# Altium PCB Nixie Tester.PcbDoc
Units mm, origin at the board's own origin, x right, y up, seen from the top; angles counter-clockwise.
Board outline 38 x 70 mm, 2 copper layers (Top Layer, Bottom Layer), stack 1.57 mm thick; 37 components, 31 nets, 102 pads, 276 vias.
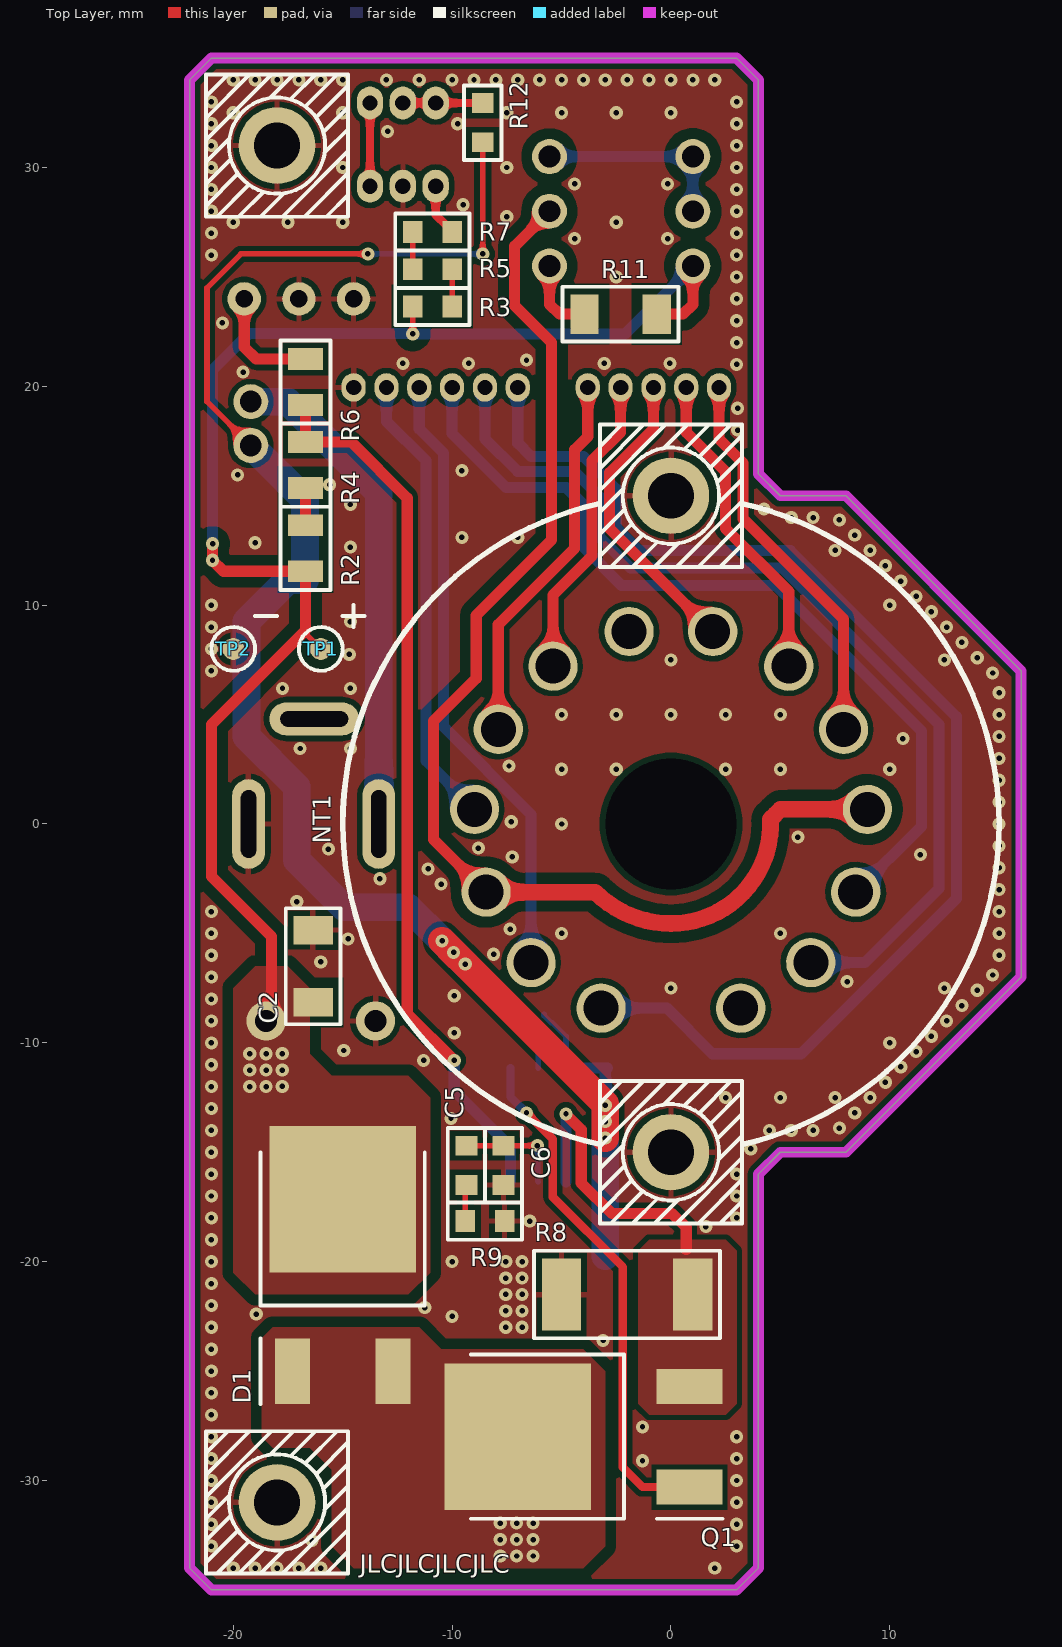
[diagram p0: Top Layer view]
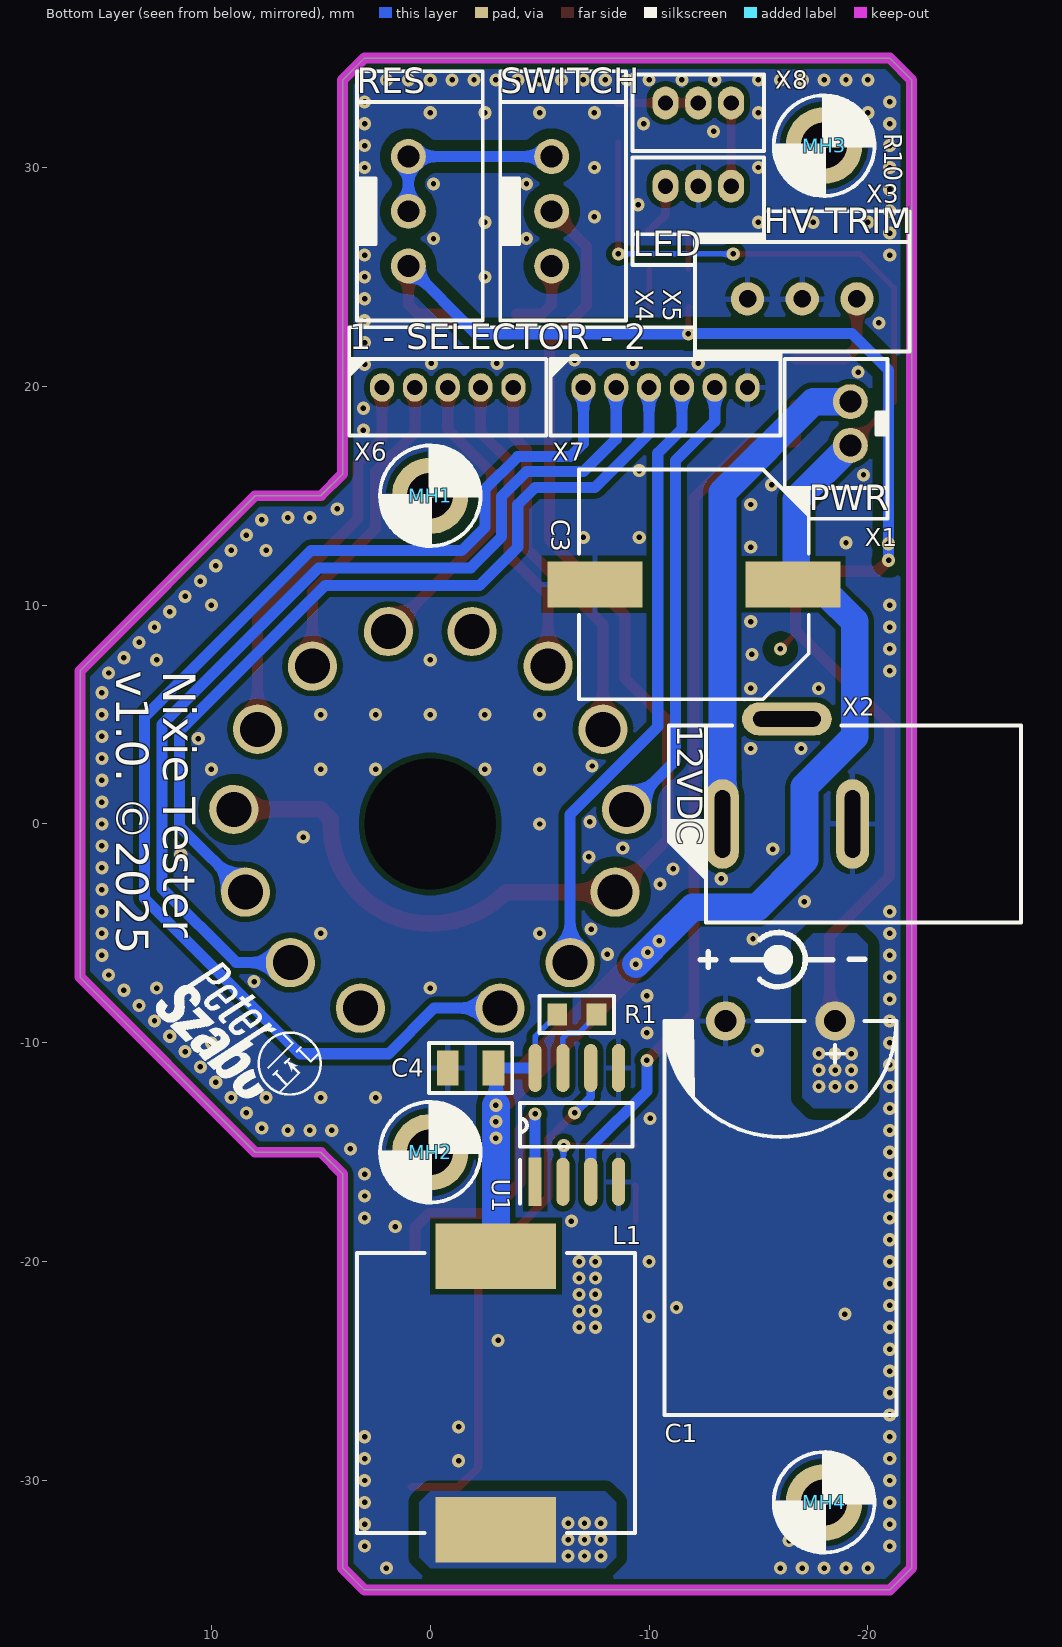
[diagram p1: Bottom Layer view, seen from below]

## Layer stack, top to bottom
Top Solder: solder mask 0.0102, Solder Resist, Dk 3.5
Top Layer: signal copper 0.035
Dielectric1: core 1.5, FR-4, Dk 4.8
Bottom Layer: signal copper 0.035
Bottom Solder: solder mask 0.0102, Solder Resist, Dk 3.5

## Board outline
-21,35 3,35 4,34 4,16 5,15 8,15 16,7 16,-7 8,-15 5,-15 4,-16 4,-34 3,-35 -21,-35 -22,-34 -22,34

## Design rules (kind name [scope] priority, off if disabled: settings)
AssemblyTestPointUsage [All] p1 off:
AssemblyTestpoint [All] p1 off: testpointundercomponent=TRUE minsize=1.016 maxsize=2.54 preferedsize=1.524 minholesize=0 maxholesize=1.016 preferedholesize=0.813 testpointgrid=0.025 usegrid=TRUE gridtolerance=0 allowsidetop=TRUE allowsidebottom=TRUE
Clearance ClearanceHV [InNetClass('HighVoltage')] p1: gap=0.5 ignorepadtopadclearanceinfootprint=FALSE except(0: Arc-Hole Track-Hole SMDPad-Hole THPad-Hole Via-Hole Fill-Hole Poly-Hole Region-Hole Text-Hole)
Clearance ClearanceFill [InPolygon vs InPolygon] p2: gap=0.25 ignorepadtopadclearanceinfootprint=FALSE except(0: Arc-Hole Track-Hole SMDPad-Hole THPad-Hole Via-Hole Fill-Hole Poly-Hole Region-Hole Text-Hole)
Clearance Poligone [InPolygon vs not InPolygon] p3: gap=0.25 ignorepadtopadclearanceinfootprint=FALSE except(0: Arc-Hole Track-Hole SMDPad-Hole THPad-Hole Via-Hole Fill-Hole Poly-Hole Region-Hole Text-Hole)
Clearance Clearance-xPP-xTP-xTT [All] p4: gap=0.15 ignorepadtopadclearanceinfootprint=FALSE except(0: Arc-Hole Track-Hole SMDPad-Hole THPad-Hole Via-Hole Fill-Hole Poly-Hole Region-Hole Text-Hole)
ComponentClearance [All] p1: gap=0.25 collisioncheckmode=3 verticalgap=0.25 showdistances=FALSE
DiffPairsRouting [All] p1: maxlimit=0.25 minlimit=0.15 mostfreqgap=0.25 toplayer_minwidth=0.254 toplayer_maxwidth=0.381 toplayer_prefwidth=0.381 bottomlayer_minwidth=0.254 bottomlayer_maxwidth=0.381 bottomlayer_prefwidth=0.381 substack1={06652235-AFCE-417E-9911-24E9A01F5C8B} toplayer_{06652235-afce-417e-9911-24e9a01f5c8b}_mingap=0.25 toplayer_{06652235-afce-417e-9911-24e9a01f5c8b}_minwidth=0.381 toplayer_{06652235-afce-417e-9911-24e9a01f5c8b}_maxwidth=0.381 toplayer_{06652235-afce-417e-9911-24e9a01f5c8b}_prefwidth=0.381 bottomlayer_{06652235-afce-417e-9911-24e9a01f5c8b}_mingap=0.25 bottomlayer_{06652235-afce-417e-9911-24e9a01f5c8b}_minwidth=0.381 bottomlayer_{06652235-afce-417e-9911-24e9a01f5c8b}_maxwidth=0.381 bottomlayer_{06652235-afce-417e-9911-24e9a01f5c8b}_prefwidth=0.381 maxuncoupledlength=12.5
FanoutControl Fanout_BGA [IsBGA] p1 off: bgadir=Out bgaviamode=Centered fanoutstyle=Auto fanoutdirection=Alternating viagrid=0.025 // Fanout_BGA (Default Rule)
Height [All] p1: minheight=0 maxheight=508 prefheight=12.5
HoleSize HoleSize-PTH [All] p1: absolutevalues=TRUE maxlimit=12.7 minlimit=0.25 maxpercent=80.000 minpercent=20.000
HoleToHoleClearance [All] p1: gap=0.15 allowstackedmicrovias=TRUE
MinimumAnnularRing "Minimum IAR  >0.45mm" [((ObjectKind = 'Pad') OR (ObjectKind = 'Via')) And (Layer = 'MultiLayer') And (HoleDiameter > AsMM(0.45))] p1: minimumring=0.125 // minimum inner annular ring for pads > 0.45mm finished hole size
MinimumAnnularRing "Minimum IAR <=0.45mm" [((ObjectKind = 'Pad') OR (ObjectKind = 'Via')) And (Layer = 'MultiLayer') And (HoleDiameter <= AsMM(0.45))] p2: minimumring=0.125 // minimum inner annular ring for pads <= 0.45mm finished hole size
MinimumSolderMaskSliver [All] p1: minsoldermaskwidth=0.1
PlaneClearance PlaneClearance-IPI [All] p1: clearance=0.4
PlaneConnect PlaneConnect_1 [All] p1: planeconnectstyle=Relief reliefexpansion=0.508 reliefentries=4 reliefconductorwidth=0.254 reliefairgap=0.254
PlaneConnect [All] p2: planeconnectstyle=Relief reliefexpansion=0.4 reliefentries=4 reliefconductorwidth=0.508 reliefairgap=0.254
PolygonConnect PolygonConnect-xTW [InNet('GND') vs IsVia] p1: connectstyle=Direct reliefconductorwidth=0.508 reliefentries=4 polygonreliefangle="90 Angle" airgapwidth=0.254
PolygonConnect PolygonConnect_1 [InNet('GND') vs not(IsVia)] p2: connectstyle=Relief reliefconductorwidth=0.254 reliefentries=4 polygonreliefangle="90 Angle" airgapwidth=0.254
PolygonConnect [All] p3: connectstyle=Direct reliefconductorwidth=0.381 reliefentries=4 polygonreliefangle="90 Angle" airgapwidth=0.25
RoomDefinition "Nixie tester" [InComponentClass('Nixie tester')] p1: confinementstyle=ConfineIn formatcopy=TRUE lockcomponents=FALSE outline 18.05,-27.05 243.05,-27.05 243.05,-14.05 18.05,-14.05
RoutingCorners [All] p1: cornerstyle=45-Degree minsetback=2.5 maxsetback=2.5
RoutingVias "RoutingVias > 0.45mm" [(ObjectKind = 'Via') And (HoleDiameter > AsMM(0.45))] p1: holewidth=0.25 width=0.6 viastyle="Through Hole" minholewidth=0.25 minwidth=0.5 maxholewidth=0.9 maxwidth=1.4 // finishet hole size > 0.45mm
RoutingVias "RoutingVias <= 0.45mm" [(ObjectKind = 'Via') And (HoleDiameter <= AsMM(0.45))] p2: holewidth=0.25 width=0.6 viastyle="Through Hole" minholewidth=0.25 minwidth=0.5 maxholewidth=0.5 maxwidth=1 // finishet hole size <= 0.45mm
SilkToSilkClearance [All] p1: silktosilkclearance=0.2
SilkToSolderMaskClearance SilkscreenOverComponentPads [IsPad] p1: minsilkscreentomaskgap=0.15 clearancetoexposedcopper=TRUE
SolderMaskExpansion [All] p1: expansion=0.1 istentingtop=FALSE
Width Width-xTW [All] p1: maxlimit=5 minlimit=0.23 preferedwidth=0.254 substack1={06652235-AFCE-417E-9911-24E9A01F5C8B} toplayer_{06652235-afce-417e-9911-24e9a01f5c8b}_maxwidth=2.54 bottomlayer_{06652235-afce-417e-9911-24e9a01f5c8b}_maxwidth=2.54
16 further rules are at their usual default settings.

## Classes and differential pairs
net class HighVoltage: HV NetD1_1 NetNT1_4 NetR2_1 NetR3_1 NetR11_1 NetX4_2

## Components (designator, comment, footprint, x,y, rotation, side; value= is the part's Value field where it differs from the comment)
C1 "10uF" "CAP-ELCO-10mm-laying THT" -16,-9 r180 bottom
C2 "100nF" CAP-1206 -16.35,-6.5 r270 top
C3 "470uF" CAP-Panasonic -12.05,10.95 r0 bottom
C4 "100nF" CAP-0805 -1.85,-11.15 r180 bottom
C5 "22nF" CAP-0603 -9.35,-15.6 r90 top
C6 "100nF" CAP-0603 -7.65,-15.6 r90 top
D1 "V20PW22-M3/I" "D-DPAK (diode)" -15,-25 r90 top
L1 "22uH" IND-SMD-12.7x12.7mm -3,-26 r270 bottom
MH1 "MECH - M2 screw" "MECH-M2 - large pad" 0,15 r180 bottom
MH2 "MECH - M2 screw" "MECH-M2 - large pad" 0,-15 r180 bottom
MH3 "MECH - M2 screw" "MECH-M2 - large pad" -18,31 r180 bottom
MH4 "MECH - M2 screw" "MECH-M2 - large pad" -18,-31 r180 bottom
NT1 "IN-18" "VT-IN-18 - no silk screen" 0,0 r90 top locked
Q1 "STD18N55M5" D-DPAK 0.85,-28 r180 top
R1 "10k" RES-0603 -6.7,-8.7 r0 bottom
R2 "1M" RES-0805 -16.7,12.6 r270 top
R3 "100k" RES-0603 -10.9,23.65 r180 top
R4 "510k" RES-0805 -16.7,16.4 r270 top
R5 "100k" RES-0603 -10.9,25.35 r0 top
R6 "4k7" RES-0805 -16.7,20.2 r270 top
R7 "100k" RES-0603 -10.9,27.05 r180 top
R8 "0R10" RES-2512 -2,-21.5 r0 top
R9 "4k7" RES-0603 -8.5,-18.15 r180 top
R10 "10k" RES-TRIM-THT -17,24 r270 bottom
R11 "10k" RES-1206 -2.3,23.3 r0 top
R12 "22k" RES-0603 -8.6,32.05 r90 top
TP1 "MISC - Testpoint SMT" MISC-TESTPOINT-SMT -16,8 r90 top
TP2 "MISC - Testpoint SMT" MISC-TESTPOINT-SMT -20,8 r0 top
U1 "LM3478" IC-SOIC-8 -6.7,-13.75 r90 bottom
X1 "CONN - 2P -THT-JST 2.00mm" "CONN-2P-THT-STRAIGHT-JST 2.00mm" -19.2,18.3 r270 bottom
X2 "CONN - PWR" CONN-POWER -19.3,0 r0 bottom
X3 "CONN - 3P - THT-JST 1.5mm" "CONN-3P-THT-JST 1.5mm" -12.25,29.15 r180 bottom
X4 "CONN - 3P -THT-JST 2.5mm" "CONN-3P-THT-STRAIGHT-JST 2.5mm" 1,28 r90 bottom
X5 "CONN - 3P -THT-JST 2.5mm" "CONN-3P-THT-STRAIGHT-JST 2.5mm" -5.55,28 r90 bottom
X6 "CONN - 5P - THT-JST 1.5mm" "CONN-5P-THT-STRAIGHT-JST 1.5mm" -0.8,19.95 r180 bottom
X7 "CONN - 6P - THT-JST 1.5mm" "CONN-6P-THT-STRAIGHT-JST 1.5mm" -10.75,19.95 r180 bottom
X8 "CONN - 3P - THT-JST 1.5mm" "CONN-3P-THT-JST 1.5mm" -12.25,32.95 r180 bottom

## Footprints (in the part's own frame and the unit in brackets; to place one, negate y for a bottom-side part, rotate by r counter-clockwise, add the part's x,y. Pads: shape width x height; smd on the part's side, far side on the other; paste and mask are expansions set on the pad)
CAP-0603 [mm]
  rect 0.9x1 smd: 1(-0.9,0) 2(0.9,0)
  silkscreen extent -1.7,-0.85 1.7,0.85, body extent -0.8,-0.41 0.8,0.41, height 0.57
CAP-0805 [mm]
  rect 1x1.6 smd: 1(-1.05,0) 2(1.05,0)
  silkscreen extent -1.9,-1.15 1.9,1.15, body extent -1,-0.63 1,0.64, height 0.52
CAP-1206 [mm]
  rect 1.3x1.8 smd: 1(-1.65,0) 2(1.65,0)
  silkscreen extent -2.65,-1.25 2.65,1.25, body extent -1.6,-0.81 1.6,0.81, height 1.32
"CAP-ELCO-10mm-laying THT" [mm]
  round 1.8 hole 1: 1(-2.5,0) 2(2.5,0)
  silkscreen extent -5.3,-18 5.3,0, body extent -5.3,-18.05 5.2,2.45, height 10.65
CAP-Panasonic [mm]
  rect 4.35x2.1 smd: 1(4.525,0) 2(-4.525,0)
  silkscreen extent -5.25,-5.25 5.25,5.25, body extent -5.8,-5.15 5.8,5.15, height 10.2
"CONN-2P-THT-STRAIGHT-JST 2.00mm" [mm]
  round 1.6 hole 1: 1(-1,0) 2(1,0)
  silkscreen extent -2.95,-3 2.95,1.7, body extent -2.93,-2.97 2.93,1.7, height 5.89
"CONN-3P-THT-JST 1.5mm" [mm]
  oval 1.2x1.5 hole 0.7: 1(-1.5,0) 2(0,0) 3(1.5,0)
  silkscreen extent -3,-2.2 3,1.3, body extent -3,-2.2 3,1.3, height 4.5
"CONN-3P-THT-STRAIGHT-JST 2.5mm" [mm]
  round 1.6 hole 1: 1(-2.5,0) 2(0,0) 3(2.5,0)
  silkscreen extent -5,-3.4 5,2.35, body extent -4.95,-3.4 4.95,2.35, height 7
"CONN-5P-THT-STRAIGHT-JST 1.5mm" [mm]
  oval 1.1x1.3 hole 0.7: 1(-3,0) 2(-1.5,0) 3(0,0) 4(1.5,0) 5(3,0)
  silkscreen extent -4.5,-2.2 4.5,1.35, body extent -4.5,-2.2 4.5,1.3, height 4.5
"CONN-6P-THT-STRAIGHT-JST 1.5mm" [mm]
  oval 1.1x1.3 hole 0.7: 1(-3.75,0) 2(-2.25,0) 3(-0.75,0) 4(0.75,0) 5(2.25,0) 6(3.75,0)
  silkscreen extent -5.25,-2.2 5.25,1.3, body extent -5.25,-2.2 5.25,1.3, height 4.5
CONN-POWER [mm]
  oval 1.5x4.1 hole 0.7 slot 3.1 at 90 deg: 1(0,0) 2(5.945,0)
  oval 4.1x1.5 hole 0.7 slot 3.1 at 0 deg: 3(3,-4.8)
  silkscreen extent -7.7,-4.5 6.7,4.5, body extent -7.7,-4.9 6.7,4.5, height 11
D-DPAK [mm]
  rect 3x1.6 smd: 1(0,2.3) 2(0,-2.3)
  rect 6.7x6.7 smd: 3(7.85,0)
  silkscreen extent -1.5,-3.75 10,3.75, body extent 0,-3.37 10.1,3.37, height 2.37
"D-DPAK (diode)" [mm]
  rect 3x1.6 smd: 1(0,2.3) 1(0,-2.3)
  rect 6.7x6.7 smd: 2(7.85,0)
  silkscreen extent -1.5,-3.75 10,3.75, body extent 0,-3.37 10.1,3.37, height 2.37
IC-SOIC-8 [mm]
  rect 2.2x0.6 smd: 1(-2.6,1.905)
  oval 2.2x0.6 smd: 2(-2.6,0.635) 3(-2.6,-0.635) 4(-2.6,-1.905) 5(2.6,-1.905) 6(2.6,-0.635) 7(2.6,0.635) 8(2.6,1.905)
  silkscreen extent -3.6,-2.54 1,2.6, body extent -3.06,-2.45 2.94,2.45, height 1.7
IND-SMD-12.7x12.7mm [mm]
  rect 3x5.5 smd: 1(-6.25,0) 2(6.25,0)
  silkscreen extent -6.4,-6.35 6.4,6.35, body extent -6.6,-6.35 6.6,6.35, height 6.55
"MECH-M2 - large pad" [mm]
  round 3.5 hole 2.1: MH(0,0)
  silkscreen extent -2.3,-2.3 2.3,2.3
MISC-TESTPOINT-SMT [mm]
  round 1 smd paste-5: 1(0,0)
  silkscreen extent -1,-1 1,1
RES-0603 [mm]
  rect 0.9x1 smd: 1(-0.9,0) 2(0.9,0)
  silkscreen extent -1.7,-0.85 1.7,0.85, body extent -0.77,-0.43 0.78,0.43, height 0.48
RES-0805 [mm]
  rect 1x1.6 smd: 1(-1.05,0) 2(1.05,0)
  silkscreen extent -1.9,-1.15 1.9,1.15, body extent -1,-0.63 1,0.63, height 0.48
RES-1206 [mm]
  rect 1.3x1.8 smd: 1(-1.65,0) 2(1.65,0)
  silkscreen extent -2.65,-1.25 2.65,1.25, body extent -1.6,-0.8 1.6,0.81, height 0.6
RES-2512 [mm]
  rect 1.8x3.3 smd: 1(-3,0) 2(3,0)
  silkscreen extent -4.25,-2 4.25,2, body extent -3.15,-1.58 3.15,1.58, height 0.63
RES-TRIM-THT [mil]
  round 60 hole 31.5: 1(0,98.43) 2(0,0) 3(0,-98.43)
  silkscreen extent -102,-193 94,193, body extent -97,-188 93,188, height 457
"VT-IN-18 - no silk screen" [mm]
  round 0 hole 6 unplated: 0(0,0)
  round 2.25 hole 1.6: 1(-8.416,-3.189) 2(-6.336,-6.392) 3(-3.115,-8.444) 4(0.667,-8.975) 5(4.329,-7.891) 6(7.211,-5.385) 7(8.795,-1.91) 8(8.795,1.91) 9(7.211,5.385) 10(4.329,7.891) 11(0.667,8.975) 12(-3.115,8.444) 13(-6.336,6.392) 14(-8.416,3.189)
  body extent -9.21,-9.77 9.59,9.77, height 9.57

## Part data
C1: library part "CAP - THT - 10mm", "Capacitor Polar", Distributor=Lomex, Order number=12-18-87
C2: library part "CAP - 1206", "Capacitor Non-Polar"
C3: library part "CAP - SMD - POL", "Capacitor Polar"
C4: library part "CAP - 0805", "Capacitor Non-Polar"
C5 C6: library part "CAP - 0603", "Capacitor Non-Polar"
D1: library part "D - V20PW22", "Schottky Rectifier, 200 V, 20 A, Single, TO-252AE, 3 Pins, 960 mV", Supplier Part Number 1=3514270, Distributor=Farnell, Order number=3514270, PartNumber=V20PW22-M3/I, Supplier 1=Farnell
L1: library part "IND - SMD", "12.7x12.7mm choke inductor"
MH1 MH2 MH3 MH4: "M3 hole with screw"
NT1: library part "VT - IN-18", "Numeric nixie tube"
Q1: library part "T - STD18N55M5", "power N-FET"
R1 R3 R5 R7 R9 R12: library part "RES - 0603", "Resistor"
R2 R4 R6: library part "RES - 0805", "Resistor"
R8: library part "RES - 2512", "Resistor"
R10: library part "RES - POT - TRIM - THT", "Trim Potentiometer"
R11: library part "RES - 1206", "Resistor"
TP1 TP2: "SMT testpoint"
U1: library part "IC - LM3478", "2.97~40V Wide Input Range Boost/SEPIC/Flyback DC-DC Controller", Supplier Part Number 1=296-38111-1-ND, Supplier 1=Digi-Key
X1: "1x2 pin THT connector", Distributor=Hestore, Order number="100.385.23; 100.341.10"
X2: "5.5/2.1/9.5mm DC táp, anya", Distributor=Lomex, Order number=43-07-67
X3 X8: "1x3 pin header"
X4 X5: "1x3 pin THT connector", Distributor=Hestore, Order number="100.415.49; 100.351.20"
X6: "1x5 pin header", Distributor=Hestore, Order number="100.464.50; 100.432.13; 100.368.81"
X7: "1x6 pin header", Distributor=Hestore, Order number="100.464.52; 100.386.37; 100.368.81"

## Via types
v1: diameter 0.6, hole 0.25, Top Layer to Bottom Layer, tented both sides, 276 vias

## Nets (pads, with @x,y where several pads share a name; then routed paths per layer and width w, separated by ;. In a path a pad name is that pad's centre, name@x,y a point inside that pad or via, vN(x,y) a via of type N, cw(c..) or ccw(c..) an arc to the next point about the centre after c; other vN are vias at no path point)
12V: C3.2 C4.2 L1.1 R1.2 R12.1 U1.8 X1.2 | length 84.1
  Top Layer w0.254: X1.2 -21.2,19.3 -21.2,24.5 -19.65,26.05 v1(-13.85,26.05) ; v1(-8.6,26.05) R12.1
  Top Layer w1.27: v1(-10.461,-5.339) v1(-9.93,-5.87) v1(-9.4,-6.4) -3,-12.8 v1(-3,-12.85) v1(-3,-13.6) v1(-3,-14.35)
  Bottom Layer w0.254: v1(-13.85,26.05) v1(-8.6,26.05) ; R1.2 -5.8,-8.75 -5.477,-9.073 -5.427,-9.073 -4.795,-9.705 U1.8
  Bottom Layer w0.508: U1.8 C4.2 -3,-11.25 v1(-3,-12.85)
  Bottom Layer w1.27: X1.2 -16.725,14.825 -16.725,11.15 -17.5,11.15 -18.115,10.535 -19.4,9.25 -19.4,4 -17.1,1.7 -17.1,-1.65 -14.95,-3.8 -12,-3.8 v1(-10.461,-5.339) v1(-9.93,-5.87) v1(-9.4,-6.4) ; L1.1 v1(-3,-14.35) v1(-3,-13.6) v1(-3,-12.85)
GND: C1.1 C2.1 C3.1 C4.1 C6.1 MH1.MH MH2.MH MH3.MH MH4.MH R8.1 R9.1 R10.2 R10.3 TP2.1 U1.4 U1.5 X2.1 X3.2 X7.6
  other v1: -20,-34 -19,-34 -18,-34 -17,-34 -16,-34 2,-34 -21,-33 3,-33 -16.4,-32.75 -21,-32 3,-32 -21,-31 3,-31 -21,-30 3,-30 -1.3,-29.1 -21,-29 3,-29 -21,-28 3,-28 -1.3,-27.55 -21,-27 -21,-26 -21,-25 -21,-24 -3.1,-23.6 -21,-23 -7.55,-23 -6.8,-23 -10,-22.5 -18.95,-22.4 -7.55,-22.25 -6.8,-22.25 -11.25,-22.1 -21,-22 -7.55,-21.5 -6.8,-21.5 -21,-21 -7.55,-20.75 -6.8,-20.75 -21,-20 -10,-20 -7.55,-20 -6.8,-20 -21,-19 1.6,-18.4 -6.45,-18.15 -21,-18 3,-18 -21,-17 3,-17 -21,-16 3,-16 -21,-15 3.65,-14.85 -21,-14 4.5,-14 5.5,-14 6.5,-14 7.7,-13.9 -10.05,-13.45 8.4,-13.2 -21,-13 2.5,-12.5 5,-12.5 7.5,-12.5 9.1,-12.5 -21,-12 9.8,-11.8 10.5,-11.1 -21,-11 -11.3,-10.8 11.2,-10.4 -14.95,-10.35 -21,-10 10,-10 11.9,-9.7 -9.9,-9.55 -21,-9 12.6,-9 13.3,-8.3 -21,-8 -9.9,-7.85 14,-7.6 0,-7.5 12.5,-7.5 8.05,-7.2 -21,-7 14.7,-6.9 -16,-6.3 -21,-6 15,-6 -8.1,-5.95 -14.75,-5.25 -21,-5 -5,-5 5,-5 15,-5 -7.35,-4.8 -21,-4 15,-4 -17.1,-3.55 15,-3 -10.5,-2.75 -13.3,-2.5 -11.1,-2.05 15,-2 -7.25,-1.5 11.4,-1.4 -15.65,-1.15 -8.8,-1.1 15,-1 5.8,-0.6 -5,0 15,0 -7.3,0.1 15,1 15,2 -5,2.5 -2.5,2.5 2.5,2.5 5,2.5 10,2.5 -7.4,2.65 15,3 -16.95,3.45 -14.65,3.45 10.6,3.9 15,4 -5,5 -2.5,5 0,5 2.5,5 5,5 15,5 15,6 -17.75,6.2 -14.65,6.2 14.7,6.9 -21,7 0,7.5 12.5,7.5 14,7.6 -14.7,7.75 -21,8 13.3,8.3 -21,9 12.6,9 -14.65,9.25 11.9,9.7 -21,10 10,10 11.2,10.4 10.5,11.1 9.8,11.8 7.5,12.5 9.1,12.5 -14.65,12.65 -19,12.85 -9.55,13.1 -7,13.1 8.4,13.2 7.7,13.9 5.5,14 6.5,14 4.25,14.4 -14.65,14.6 -15.6,15.5 -19.8,15.95 -9.55,16.15 3.05,18 3.05,19 -19.55,20.65 3,21 -12.25,21.05 -9.25,21.05 -3.05,21.05 -0.05,21.05 -6.6,21.2 3,22 -20.5,22.9 3,23 3,24 -2.5,25 3,25 -21,26 3,26 -4.4,26.75 -0.15,26.75 -21,27 3,27 -20,27.5 -17.5,27.5 -15,27.5 -2.5,27.5 -7.5,27.75 -21,28 3,28 -9.5,28.3 -21,29 3,29 -4.4,29.25 -0.15,29.25 -21,30 -15,30 -7.5,30 3,30 -21,31 3,31 -12.95,31.65 -21,32 -9.75,32 3,32 -20,32.5 -15,32.5 -7.5,32.5 -5,32.5 -2.5,32.5 0,32.5 -21,33 3,33 -20,34 -19,34 -18,34 -17,34 -16,34 -15,34 -13,34 -11.5,34 -10,34 -9,34 -8,34 -7,34 -6,34 -5,34 -4,34 -3,34 -2,34 -1,34 0,34 1,34 2,34
HV: C1.2 C2.2 D1.2 R2.2 R3.2 R11.2 TP1.1 X4.1 | length 67.6
  Top Layer w0.254: -16.7,8.85 -16.7,8.7 v1(-16,8) ; R3.2@-11.825,23.625 -11.8,23.6 v1(-11.8,22.4)
  Top Layer w0.508: v1(-20.941,12.809) -20.946,12.804 -20.946,12.054 v1(-20.95,12.05) -20.45,11.55 R2.2@-17.3,11.55 ; C1.2@-18.25,-8.85 -18.25,-5.15 -20.996,-2.404 -20.996,4.554 -16.7,8.85 R2.2 -17,11.55 R2.2@-17.246,11.304 ; R11.2@-0.931,23.019 R11.2 ; R11.2@-0.6,23.3 0.55,23.3 1,23.75 X4.1
  Bottom Layer w0.508: v1(-20.95,12.05) -20.95,20.746 -19.278,22.418 -12.468,22.418 ; -12.459,22.409 -11.709,22.409 v1@-11.718,22.4 ; v1(-11.8,22.4) v1@-11.718,22.4 ; X4.1 -2.1,22.4 v1@-11.718,22.4
  other v1: -19.25,-12 -18.5,-12 -17.76,-11.992 -19.25,-11.25 -18.5,-11.25 -17.76,-11.242 -19.25,-10.5 -18.5,-10.5 -17.76,-10.492
NetC5_1: C5.1 R9.2 | length 1.7
  Top Layer w0.254: R9.2 -9.4,-16.55 C5.1
NetC5_2: C5.2 C6.2 U1.2 | length 4.9
  Top Layer w0.254: C5.2 C6.2 v1(-6.1,-14.7)
  Bottom Layer w0.254: v1(-6.1,-14.7) -6.082,-14.718 -6.082,-16.332 U1.2
NetD1_1: D1.1 L1.2 Q1.3
  other v1: -7.8,-33.45 -7.05,-33.45 -6.3,-33.45 -7.8,-32.7 -7.05,-32.7 -6.3,-32.7 -7.8,-31.95 -7.05,-31.95 -6.3,-31.95
NetNT1_2: NT1.2 X7.2 | length 44.4
  Bottom Layer w0.508: X7.2 -8.5,17.6 -7,16.1 -4.4,16.1 -3.258,14.958 -3.258,13.108 -1.85,11.7 5.1,11.7 12.25,4.55 12.25,-2.95 8.864,-6.336 NT1.2
NetNT1_3: NT1.3 X7.3 | length 38.9
  Bottom Layer w0.508: X7.3 -10,17.85 -7.534,15.384 -4.784,15.384 -4,14.6 -4,12.65 -2.25,10.9 4.8,10.9 11.45,4.25 11.45,-0.109 NT1.3
NetNT1_4: NT1.4 NT1.12 X5.2 | length 56.5
  Top Layer w0.508: NT1.12 -10.854,-0.705 -10.854,4.696 -8.899,6.651 -8.899,9.527 -5.45,12.976 -5.45,22 -7.15,23.7 -7.15,26.4 X5.2
  Top Layer w0.762: NT1.12 -3.456,-3.115 ccw(c0.005,0.347) 0.005,-4.549 ccw(c0.005,0) 4.549,0.221 4.77,0.443 cw(c5.31,-0.095) 4.773,0.445 4.995,0.667 5.31,0.667 NT1.4
NetNT1_5: NT1.5 X6.1 | length 18
  Top Layer w0.508: X6.1 2.2,17.6 3.3,16.5 3.3,13.95 7.891,9.359 NT1.5
NetNT1_6: NT1.6 X6.2 | length 14.7
  Top Layer w0.508: X6.2 0.7,17.9 2.5,16.1 2.5,13.5 5.385,10.615 NT1.6
NetNT1_7: NT1.7 X6.3 | length 13.9
  Top Layer w0.508: X6.3 -0.8,18.05 -2.8,16.05 -2.8,13.505 NT1.7
NetNT1_9: NT1.9 X6.4 | length 14
  Top Layer w0.508: NT1.9 -5.385,10.465 -3.6,12.25 -3.6,16.6 -2.3,17.9 X6.4
NetNT1_10: NT1.10 X6.5 | length 17.3
  Top Layer w0.508: NT1.10 -7.891,9.109 -4.4,12.6 -4.4,17.1 -3.8,17.7 X6.5
NetNT1_11: NT1.11 X7.5 | length 21
  Bottom Layer w0.508: X7.5 -13,18.4 -11.2,16.6 -11.2,2.892 NT1.11
NetNT1_13: NT1.13 X7.4 | length 28.4
  Bottom Layer w0.508: X7.4 -11.5,18.05 -10.4,16.95 -10.4,4.45 -6.392,0.442 NT1.13
NetNT1_14: NT1.14 X7.1 | length 57.1
  Bottom Layer w0.508: X7.1 -7,17.4 -6.4,16.8 -4,16.8 -2.5,15.3 -2.5,13.55 -1.45,12.5 5.45,12.5 13.05,4.9 13.05,-3.4 5.95,-10.5 1.9,-10.5 -0.184,-8.416 NT1.14
NetQ1_1: Q1.1 U1.6 | length 23.8
  Top Layer w0.381: v1(-6.6,-13.2) -5.4,-14.4 -5.4,-17.05 -2.2,-20.25 -2.2,-29.4 -1.3,-30.3 Q1.1
  Bottom Layer w0.381: U1.6 -7.335,-12.465 v1(-6.6,-13.2)
NetQ1_2: Q1.2 R8.2 U1.1 | length 13.2
  Top Layer w0.508: v1(-4.795,-13.25) -4.795,-13.275 -4.1,-13.97 -4.1,-16.4 -2.7,-17.8 0.05,-17.8 0.7,-18.45 0.7,-19.45
  Bottom Layer w0.508: U1.1 v1(-4.795,-13.25)
NetR1_1: R1.1 U1.7 | length 3.4
  Bottom Layer w0.254: R1.1 -7.6,-8.75 -6.8,-9.55 -6.3,-9.55 -6.065,-9.785 U1.7
NetR2_1: R2.1 R4.2 | length 1.7
  Top Layer w0.508: R2.1 R4.2
NetR3_1: R3.1 R5.2 | length 1.7
  Top Layer w0.254: R3.1 R5.2
NetR4_1: R4.1 R6.2 U1.3 | length 40.6
  Top Layer w0.508: R6.2 R4.1 -14.6,17.45 -12.05,14.9 -12.05,-8.65 v1(-9.9,-10.8)
  Bottom Layer w0.508: v1(-9.9,-10.8) -9.9,-12.2 -7.335,-14.765 U1.3
NetR5_1: R5.1 R7.2 | length 1.7
  Top Layer w0.254: R5.1 R7.2
NetR6_1: R6.1 R10.1 | length 5.2
  Top Layer w0.508: R10.1 -19.5,21.8 -18.95,21.25 R6.1
NetR7_1: R7.1 X3.1 | length 2.5
  Top Layer w0.381: X3.1 -10.75,27.828 -10.527,27.605 -10.505,27.605 -10,27.1 R7.1 R7.1@-10.05,27
NetR11_1: R11.1 X5.1 | length 3.6
  Top Layer w0.508: X5.1@-5.659,25.5 X5.1 -5.55,23.75 -5.1,23.3 R11.1
NetR12_2: R12.2 X8.1 X8.2 | length 3.7
  Top Layer w0.381: X8.2 X8.1 R12.2
NetX1_1: X1.1 X2.2 | length 24
  Bottom Layer w1.27: X1.1 -17.5,19.3 -13.35,15.15 X2.2@-13.35,-1.29
NetX3_3: X3.3 X8.3 | length 3.8
  Top Layer w0.381: X3.3 X8.3
NetX4_2: X4.2 X4.3 X5.3 | length 9
  Bottom Layer w0.508: X5.3 X4.3 X4.2
pads on no net: NT1.0 NT1.1 NT1.8 X2.3

## Polygon pours and split planes (outlines as drawn)
GND on Top Layer "GND_L01_P007" (solid, pour order 7): -21,-35 3,-35 4,-34 4,-16 5,-15 8,-15 16,-7 16,7 8,15 5,15 4,16 4,34 3,35 -21,35 -22,34 -22,-34
NetQ1_2 on Top Layer "NETQ1_2_L01_P002" (solid, pour order 2): 2.5,-27 3,-26.5 3,-19.5 2.5,-19 -1,-19 -1.5,-19.5 -1.5,-26.5 -1,-27
HV on Top Layer "HV_L01_P004" (solid, pour order 4): -19,-21.5 -20,-20.5 -20,-7.5 -19,-6.5 -17.5,-6.5 -16.5,-7.5 -16.5,-10.5 -15.5,-11.5 -12,-11.5 -11,-12.5 -11,-20.5 -12,-21.5
NetD1_1 on Top Layer "NETD1_1_L01_P000" (solid, pour order 0): -3,-25 -4,-24 -10.5,-24 -11.5,-23 -18.2,-23 -18.7,-23.5 -18.7,-28 -18.2,-28.5 -16.5,-28.5 -15.5,-29.5 -15.5,-33 -14.5,-34 -4,-34 -3,-33
GND on Bottom Layer "GND_L02_P006" (solid, pour order 6): -21,-35 3,-35 4,-34 4,-16 5,-15 8,-15 16,-7 16,7 8,15 5,15 4,16 4,34 3,35 -21,35 -22,34 -22,-34
NetD1_1 on Bottom Layer "NETD1_1_L02_P001" (solid, pour order 1): -8,-34 -8.5,-33.5 -8.5,-31 -8,-30.5 0,-30.5 0.5,-31 0.5,-33.5 0,-34
HV on Bottom Layer "HV_L02_P005" (solid, pour order 5): -20,-12.5 -19.5,-13 -17.5,-13 -17,-12.5 -17,-5.5 -17.5,-5 -19.5,-5 -20,-5.5

## Keep-outs
Keep-Out Layer:
  the board outline again, w0.5

## Silkscreen, mask and mechanical layers (free items; w line width, h text height)
Top Overlay:
  lines w0.178: -19,9.5 -18,9.5 ; -15,9.5 -14,9.5 ; -14.5,9 -14.5,10
  lines w0.254: -3.296,14.633 ccw(c0,0) -3.275,-14.638 ; 3.275,14.638 cw(c0,0) 3.296,-14.633
  text "JLCJLCJLCJLC" at -14.222,-34.222 h0.81
Bottom Overlay:
  drawing of 48 lines, arcs and shapes, not listed
  text "SWITCH" at -3.2,33 h2
  text "RES" at 3.35,33 h2
  text "HV TRIM" at -15.25,26.6 h2
  text "LED" at -9.25,25.55 h2
  text "1 - SELECTOR - 2" at 3.7,21.3 h2
  text "PWR" at -17.3,13.95 h2
  text "Nixie Tester" at 12.7,7 h2.54 r90
  text "v1.0. ©2025" at 14.85,7 h2.54 r90
  text "12VDC" at -10.9,4.528 h2 r90
Mechanical 2-BoardOutline:
  the board outline again, w0.254

## Dimensions
3,-35 to 0,0 on Mechanical 3 - Dimensions
-22,-34 to 0,0 on Mechanical 3 - Dimensions
-21,-35 to -21,35 on Mechanical 3 - Dimensions
-18,-31 to -21,-35 on Mechanical 3 - Dimensions
-18,31 to -21,35 on Mechanical 3 - Dimensions
0,15 to 4,34 on Mechanical 3 - Dimensions
-18,31 to 0,15 on Mechanical 3 - Dimensions
-22,34 to -18,31 on Mechanical 3 - Dimensions
4,34 to 16,7 on Mechanical 3 - Dimensions
-22,34 to 16,7 on Mechanical 3 - Dimensions
-22,34 to 4,34 on Mechanical 3 - Dimensions
-18,-31 to -18,31 on Mechanical 3 - Dimensions